# Altium PCB NRF_PCB.PcbDoc
Units mm, origin at the board's own origin, x right, y up, seen from the top; angles counter-clockwise.
Board outline 29.55 x 15.06 mm, 4 copper layers (Top Layer, GND, Power, Bottom Layer), stack 0.603 mm thick; 17 components, 17 nets, 59 pads, 18 vias.
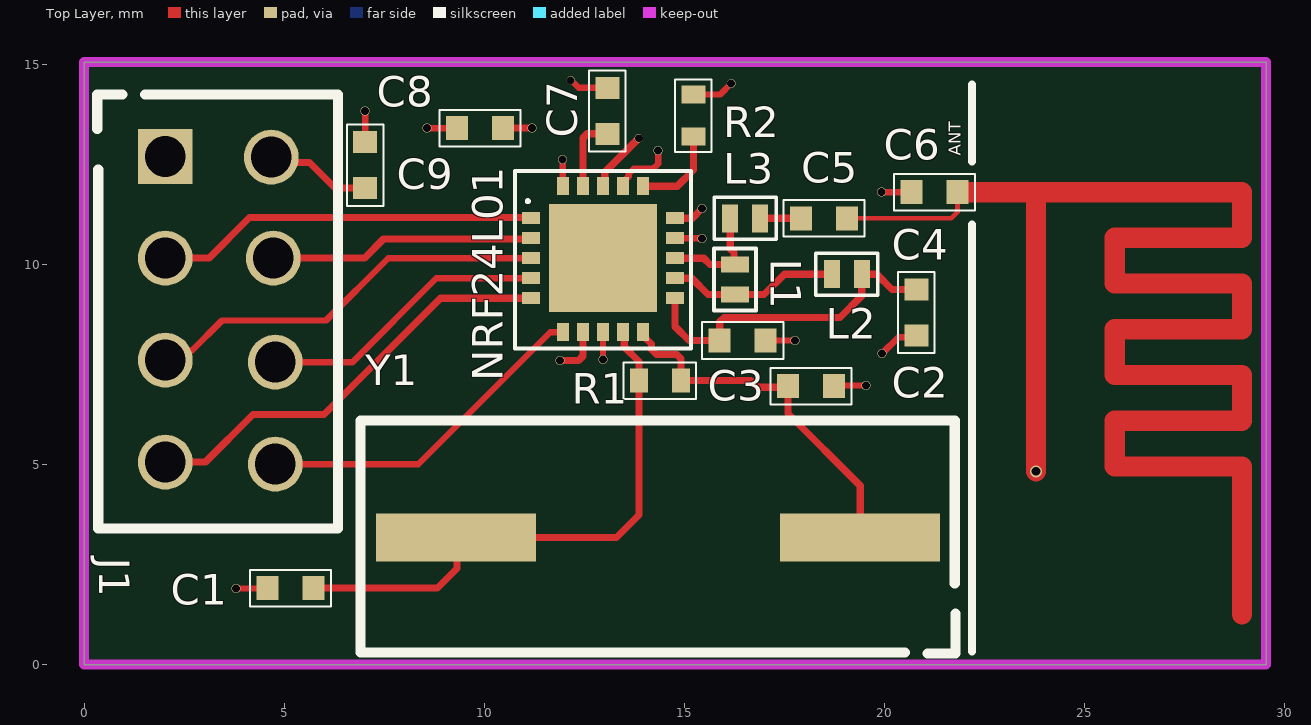
[diagram p0: Top Layer view]
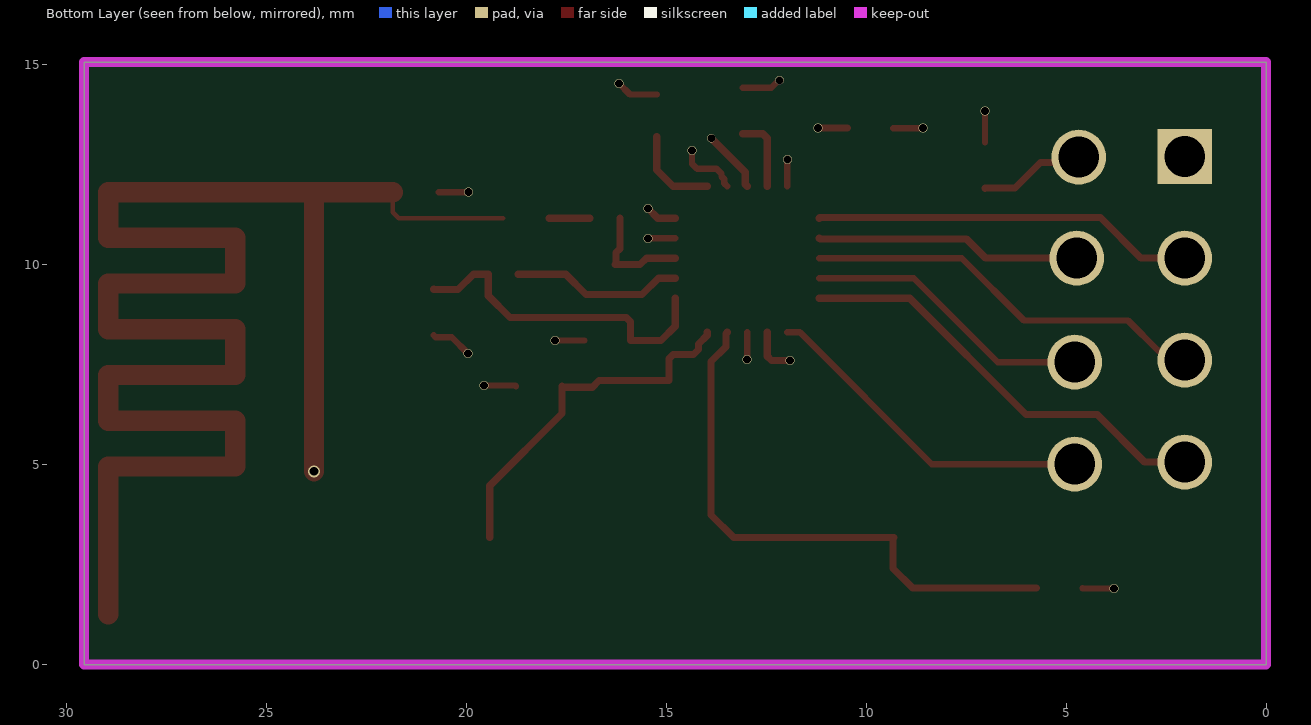
[diagram p1: Bottom Layer view, seen from below]
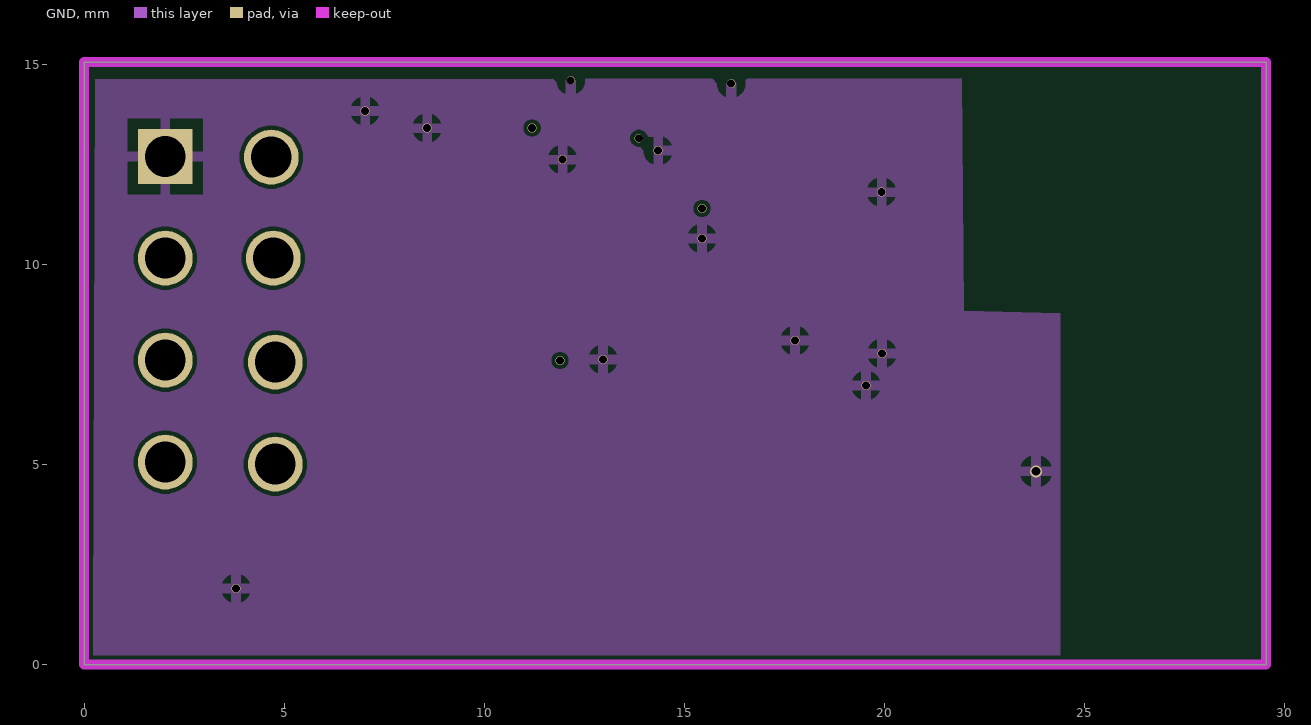
[diagram p2: GND]
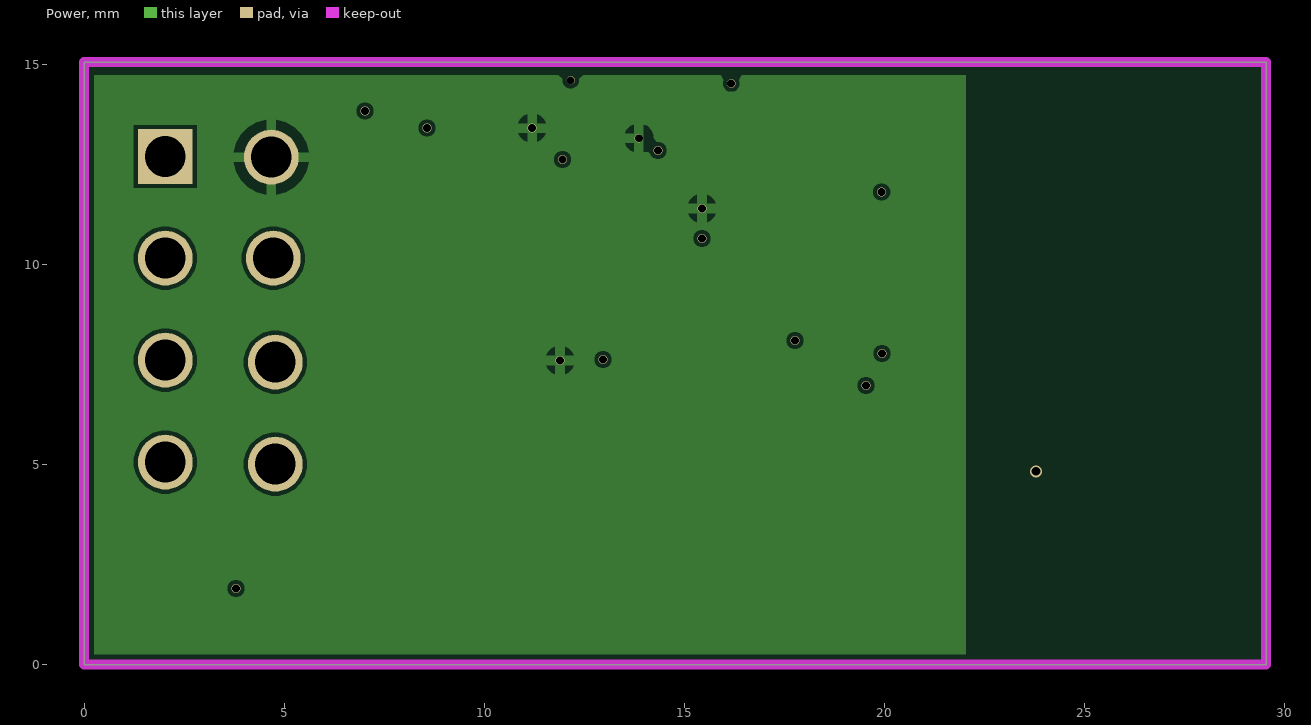
[diagram p3: Power]

## Layer stack, top to bottom
Top Solder: solder mask 0.0102, Solder Resist, Dk 3.5
Top Layer: signal copper 0.0356
Dielectric 2: prepreg 0.0711, PP-006, Dk 4.1
GND: signal copper 0.035
Dielectric 1: dielectric 0.32, FR-4, Dk 4.8
Power: signal copper 0.035
Dielectric 3: prepreg 0.0711, PP-006, Dk 4.1
Bottom Layer: signal copper 0.0356
Bottom Solder: solder mask 0.0102, Solder Resist, Dk 3.5

## Board outline
0,0 0,15.062 29.55,15.062 29.55,0

## Design rules (kind name [scope] priority, off if disabled: settings)
Clearance [All] p1: gap=0.1 ignorepadtopadclearanceinfootprint=FALSE
HoleToHoleClearance [All] p1: gap=0.2 allowstackedmicrovias=TRUE
MinimumSolderMaskSliver [All] p1: minsoldermaskwidth=0.1
NetAntennae [All] p1 off: netantennaetolerance=25
PolygonConnect [All] p1: connectstyle=Relief reliefconductorwidth=0.254 reliefentries=4 polygonreliefangle="90 Angle" airgapwidth=0.254
RoutingVias [All] p1: holewidth=0.381 width=0.4 viastyle="Through Hole" minholewidth=0.16 minwidth=0.2 maxholewidth=0.2 maxwidth=0.5
ShortCircuit [All] p1: allowed=TRUE
SilkToSilkClearance [All] p1: silktosilkclearance=0.127
SilkToSolderMaskClearance [IsPad] p1: minsilkscreentomaskgap=0.1 clearancetoexposedcopper=TRUE
SolderMaskExpansion [All] p1: expansion=0.102 istentingtop=FALSE
Width Antenna_Width [InNet('NetC5_2')] p1: maxlimit=0.508 minlimit=0.508 preferedwidth=0.508 minimp=50.000000 maximp=50.000000 favimp=50.000000
Width Width_50Ohm [InNet('NetC5_2')] p2: maxlimit=0.116 minlimit=0.068 preferedwidth=0.116 toplayer_minwidth=0.116 midlayer1_maxwidth=0.068 midlayer1_prefwidth=0.068 midlayer2_maxwidth=0.068 midlayer2_prefwidth=0.068 bottomlayer_minwidth=0.116 impedanceprofiledriven=TRUE impedanceprofileid={06FA9C47-8C6F-405E-810A-9FE35535318C} impedanceprofilevalue=50.000000 minimp=50.000000 maximp=50.000000 favimp=50.000000
Width [All] p3: maxlimit=0.18 minlimit=0.16 preferedwidth=0.18 minimp=50.000000 maximp=50.000000 favimp=50.000000
24 further rules are at their usual default settings.

## Components (designator, comment, footprint, x,y, rotation, side; value= is the part's Value field where it differs from the comment)
C1 "Cap 22pF" "Cap 22pF" 5.163,1.911 r0 top
C2 "Cap 22pF" "Cap 22pF" 18.177,6.958 r180 top
C3 "Cap 2.2nF" "Cap 2.2nF" 16.466,8.101 r0 top
C4 "Cap 4.7pF" "Cap 4.7 pF" 20.807,8.806 r270 top
C5 "Cap 1.5pF" "Cap 1.5pF" 18.501,11.155 r0 top
C6 "Cap 1 pF" "Cap 1pF" 21.26,11.811 r0 top
C7 "Cap 33nf" "Cap 33nF" 13.081,13.843 r270 top
C8 "Cap 10nF" "Cap 10nF" 9.897,13.411 r0 top
C9 "Cap 10nF" "Cap 10nF" 7.026,12.484 r270 top
J1 "Header 4x4" "Header 4x4" 2.032,10.16 r0 top
L1 "Inductor 8.2nH" "Inductor 8.2nH" 16.275,9.625 r90 top
L2 "Inductor 2.7nH" "Inductor 2.7nH" 19.069,9.758 r0 top
L3 "Inductor 3.9 nH" "Inductor 3.9nH" 16.529,11.155 r0 top
NRF24L01 "NRF24L01-ND" NRF24L01-ND 12.97,10.133 r0 top
R1 "Resistance 1M Ohm" "Resistor 1 M Ohm" 14.4,7.1 r0 top
R2 "Resistance 22k Ohm" "Resistor 22k Ohm" 15.234,13.725 r90 top
Y1 "Crystal 16 MHz" "Crystal 16MHz" 14.351,3.175 r180 top

## Footprints (in the part's own frame and the unit in brackets; to place one, negate y for a bottom-side part, rotate by r counter-clockwise, add the part's x,y. Pads: shape width x height; smd on the part's side, far side on the other; paste and mask are expansions set on the pad)
"Cap 1.5pF" [mm]
  rect 0.55x0.6 smd: 1(-0.575,0) 2(0.575,0)
  silkscreen extent -1.01,-0.46 1.02,0.46, body extent -0.52,-0.28 0.52,0.28, height 0.56
"Cap 1pF" [mm]
  rect 0.55x0.6 smd: 1(-0.575,0) 2(0.575,0)
  silkscreen extent -1.01,-0.46 1.02,0.46, body extent -0.52,-0.28 0.52,0.28, height 0.56
"Cap 2.2nF" [mm]
  rect 0.55x0.6 smd: 1(-0.575,0) 2(0.575,0)
  silkscreen extent -1.01,-0.46 1.02,0.46, body extent -0.52,-0.28 0.52,0.28, height 0.56
"Cap 4.7 pF" [mm]
  rect 0.55x0.6 smd: 1(-0.575,0) 2(0.575,0)
  silkscreen extent -1.01,-0.46 1.02,0.46, body extent -0.52,-0.28 0.52,0.28, height 0.56
"Cap 10nF" [mm]
  rect 0.55x0.6 smd: 1(-0.575,0) 2(0.575,0)
  silkscreen extent -1.01,-0.46 1.02,0.46, body extent -0.52,-0.28 0.52,0.28, height 0.56
"Cap 22pF" [mm]
  rect 0.55x0.6 smd: 1(-0.575,0) 2(0.575,0)
  silkscreen extent -1.01,-0.46 1.02,0.46, body extent -0.52,-0.28 0.52,0.28, height 0.56
"Cap 33nF" [mm]
  rect 0.55x0.6 smd: 1(-0.575,0) 2(0.575,0)
  silkscreen extent -1.01,-0.46 1.02,0.46, body extent -0.52,-0.28 0.52,0.28, height 0.56
"Crystal 16MHz" [mm] "4 MHz ±30ppm Crystal 12pF 80 Ohms HC-49/US"
  rect 4x1.2 smd: 1(-5.05,0) 2(5.05,0)
  silkscreen extent -7.44,-2.93 7.44,2.9, body extent -6.35,-2.4 6.45,2.4, height 4.04
"Header 4x4" [mm]
  rect 1.37x1.37 hole 1.02: 1(0,2.54)
  round 1.37 hole 1.02: 2(2.65,2.525) 3(0,0) 4(2.7,0) 5(0,-2.55) 6(2.75,-2.6) 7(0,-5.1) 8(2.75,-5.15)
  silkscreen extent -1.7,-6.76 4.32,4.09, body extent -1.35,-6.46 3.92,3.79, height 8.63
"Inductor 2.7nH" [mm]
  rect 0.4x0.7 smd: 1(-0.375,0) 2(0.375,0)
  silkscreen extent -0.78,-0.53 0.78,0.53, body extent -0.5,-0.28 0.5,0.28, height 0.51
"Inductor 3.9nH" [mm]
  rect 0.4x0.7 smd: 1(-0.375,0) 2(0.375,0)
  silkscreen extent -0.78,-0.53 0.78,0.53, body extent -0.5,-0.28 0.5,0.28, height 0.51
"Inductor 8.2nH" [mm] "FIXED IND 8.2NH 680MA 100MOHM SM"
  rect 0.4x0.7 smd: 1(-0.375,0) 2(0.375,0)
  silkscreen extent -0.78,-0.53 0.78,0.53, body extent -0.5,-0.28 0.5,0.28, height 0.51
NRF24L01-ND [mm] "IC RF TxRx Only General ISM > 1GHz 2.4GHz 20-VFQFN Exposed Pad"
  rect 0.45x0.3 smd mask-2539.97: 1(-1.8,1.025) 2(-1.8,0.525) 3(-1.8,0.025) 4(-1.8,-0.475) 5(-1.8,-0.975) 11(1.8,-0.975) 12(1.8,-0.475) 13(1.8,0.025) 14(1.8,0.525) 15(1.8,1.025)
  rect 0.3x0.45 smd mask-2539.97: 6(-1,-1.825) 7(-0.5,-1.825) 8(0,-1.825) 9(0.5,-1.825) 10(1,-1.825) 16(1,1.825) 17(0.5,1.825) 18(0,1.825) 19(-0.5,1.825) 20(-1,1.825)
  rect 2.7x2.7 smd mask-2539.97: 21(0,0.025)
  silkscreen extent -2.2,-2.24 2.2,2.2, body extent -2,-1.98 2,2.02, height 0.96
"Resistor 1 M Ohm" [mm]
  rect 0.45x0.6 smd: 1(-0.525,0) 2(0.525,0)
  silkscreen extent -0.91,-0.46 0.9,0.46, body extent -0.55,-0.28 0.55,0.28, height 0.36
"Resistor 22k Ohm" [mm]
  rect 0.45x0.6 smd: 1(-0.525,0) 2(0.525,0)
  silkscreen extent -0.91,-0.46 0.9,0.46, body extent -0.55,-0.28 0.55,0.28, height 0.36

## Part data
L1: "FIXED IND 8.2NH 680MA 100MOHM SM", Part Number=AISC-0402-8N2G-T, Link=https://www.digikey.com/en/products/detail/abracon-llc/AISC-0402-8N2G-T/3059627
NRF24L01: "IC RF TxRx Only General ISM > 1GHz 2.4GHz 20-VFQFN Exposed Pad", Link=https://www.digikey.com/en/products/detail/nordic-semiconductor-asa/NRF24L01/4691779
Y1: "CRYSTAL 4.0000MHZ 12PF SMD", Part Number=J49SMH-A-G-G-K-4M0, Link=https://www.digikey.com/en/products/detail/jauch-quartz/J49SMH-A-G-G-K-4M0/10416031

## Via types
v1: diameter 0.22, hole 0.2, Top Layer to Bottom Layer, 17 vias
v2: diameter 0.3, hole 0.22, Top Layer to Bottom Layer, 1 vias

## Nets (pads, with @x,y where several pads share a name; then routed paths per layer and width w, separated by ;. In a path a pad name is that pad's centre, name@x,y a point inside that pad or via, vN(x,y) a via of type N, cw(c..) or ccw(c..) an arc to the next point about the centre after c; other vN are vias at no path point)
CE: J1.3 NRF24L01.1 | length 9.6
  Top Layer w0.18: J1.3 3.124,10.16 4.137,11.173 11.155,11.173 NRF24L01.1
CSN: J1.4 NRF24L01.2 | length 6.6
  Top Layer w0.18: J1.4 7.01,10.16 7.492,10.642 11.154,10.642 NRF24L01.2
GND: C1.1 C2.1 C3.2 C4.2 C6.1 C7.1 C8.1 C9.1 J1.1 NRF24L01.8 NRF24L01.14 NRF24L01.17 NRF24L01.20 R2.2 | length 11.3
  Top Layer w0.16: v1(3.8,1.9) 4.577,1.9 C1.1 ; C9.1 v1(7.026,13.839) ; v1(8.576,13.411) C8.1 ; v1(11.963,12.624) 11.967,12.62 11.967,11.961 NRF24L01.20 ; v1(12.167,14.605) 12.183,14.605 12.37,14.418 C7.1 ; NRF24L01.8 12.973,8.305 12.973,7.628 v1(12.975,7.625) ; NRF24L01.17 13.54,12.028 13.54,12.128 13.613,12.201 13.613,12.269 13.74,12.395 14.224,12.395 14.351,12.522 v1(14.351,12.852) ; NRF24L01.14 14.774,10.654 15.446,10.654 v1(15.45,10.65) ; R2.2 15.901,14.25 v1(16.18,14.529) ; C3.2 C3.2 v1(17.775,8.1) ; C2.1 18.769,6.975 v1(19.55,6.975) ; v1(19.939,11.811) C6.1 ; v1(19.95,7.775) 20.361,8.186 20.762,8.186 C4.2
  other v2: 23.8,4.831
IRQ: J1.8 NRF24L01.6 | length 8.6
  Top Layer w0.16: J1.8 8.355,5.01 11.653,8.308 NRF24L01.6
MISO: J1.7 NRF24L01.5 | length 10.8
  Top Layer w0.18: J1.7 3.032,5.06 4.222,6.25 6,6.25 8.908,9.158 NRF24L01.5
MOSI: J1.6 NRF24L01.4 | length 7.3
  Top Layer w0.16: J1.6 6.71,7.56 8.808,9.658 NRF24L01.4
NetC1_2: C1.2 NRF24L01.9 R1.1 Y1.2 | length 14.1
  Top Layer w0.18: C1.2 8.833,1.911 9.325,2.403 9.325,3.151 Y1.2 13.31,3.175 13.875,3.74 R1.1 13.875,7.575 13.504,7.946 13.504,8.274 NRF24L01.9
NetC2_2: C2.2 NRF24L01.10 R1.2 Y1.1 | length 9.2
  Top Layer w0.18: NRF24L01.10 13.97,8.233 14.186,8.017 14.186,7.877 14.314,7.75 14.82,7.75 14.925,7.645 R1.2 16.674,7.1 16.84,6.934 17.578,6.934 C2.2 17.602,6.274 19.406,4.47 19.406,3.18 Y1.1
NetC3_1: C3.1 C4.1 L2.2 NRF24L01.11 | length 8.3
  Top Layer w0.18: NRF24L01.11 14.77,8.455 15.124,8.101 C3.1 15.891,8.57 15.996,8.675 18.9,8.675 19.444,9.219 L2.2 19.817,9.758 20.2,9.375 20.801,9.375 C4.1
NetC5_1: C5.1 L3.2 | length 1
  Top Layer w0.18: L3.2 C5.1
NetC5_2: C5.2 C6.2 | length 47
  Top Layer w0.116: C5.2 21.68,11.155 21.835,11.31 C6.2
  Top Layer w0.508: C6.2 23.8,11.811 28.947,11.811 28.947,10.668 ; 23.8,4.831 23.8,11.765 ; 28.948,1.25 28.948,4.933 ; 28.948,4.953 25.768,4.953 25.768,6.096 28.948,6.096 28.948,7.239 25.768,7.239 25.768,8.382 28.948,8.382 28.948,9.525 25.768,9.525 25.768,10.668 28.948,10.668
NetC7_2: C7.2 NRF24L01.19 | length 1.9
  Top Layer w0.18: NRF24L01.19 12.47,13.156 12.582,13.268 C7.2
NetL1_1: L1.1 L2.1 NRF24L01.12 | length 4.3
  Top Layer w0.18: NRF24L01.12 15.192,9.658 15.6,9.25 L1.1 17,9.25 17.508,9.758 L2.1
NetL1_2: L1.2 L3.1 NRF24L01.13 | length 2.8
  Top Layer w0.18: NRF24L01.13 15.492,10.158 15.65,10 L1.2 16.25,10.025 16.25,10.3 16.154,10.396 L3.1
NetNRF24L01_16: NRF24L01.16 R2.1 | length 2.3
  Top Layer w0.18: NRF24L01.16 14.828,11.958 15.234,12.364 R2.1
SCK: J1.5 NRF24L01.3 | length 10.2
  Top Layer w0.16: J1.5 2.264,7.842 2.692,7.842 3.45,8.6 6.05,8.6 7.608,10.158 NRF24L01.3
VDD: C8.2 C9.2 J1.2 NRF24L01.7 NRF24L01.15 NRF24L01.18 | length 7
  Top Layer w0.18: J1.2 4.818,12.549 5.637,12.549 6.274,11.913 7.023,11.913 C9.2 ; C8.2 v1(11.201,13.411) ; v1(11.9,7.6) 12.365,7.6 12.47,7.705 NRF24L01.7 ; NRF24L01.18 13.018,12.006 13.018,12.307 v1(13.868,13.157) ; NRF24L01.15 15.208,11.158 v1(15.45,11.4)
pads on no net: NRF24L01.21

## Polygon pours and split planes (outlines as drawn)
VDD on Power "VDD_L03_P002" (solid, remove dead copper, pour order 2): 0.254,14.732 22.047,14.732 22.047,0.254 0.254,0.254
GND on GND "GND_L02_P003" (solid, remove dead copper, pour order 3): 0.279,14.63 21.942,14.655 21.992,8.847 24.409,8.788 24.409,0.203 0.229,0.203

## Keep-outs
Keep-Out Layer:
  the board outline again, w0.254

## Silkscreen, mask and mechanical layers (free items; w line width, h text height)
Top Overlay:
  lines w0.2: 22.205,0.33 22.205,10.998 ; 22.205,12.573 22.205,14.503
  text "ANT" at 21.922,12.724 h0.3 r90